# Altium PCB PCB2.PcbDoc
Units mil, origin at the board's own origin, x right, y up, seen from the top; angles counter-clockwise.
Board outline 942.27 x 4047.27 mil, 2 copper layers (Top Layer, Bottom Layer); 4 components, 12 nets, 32 pads, 0 vias.
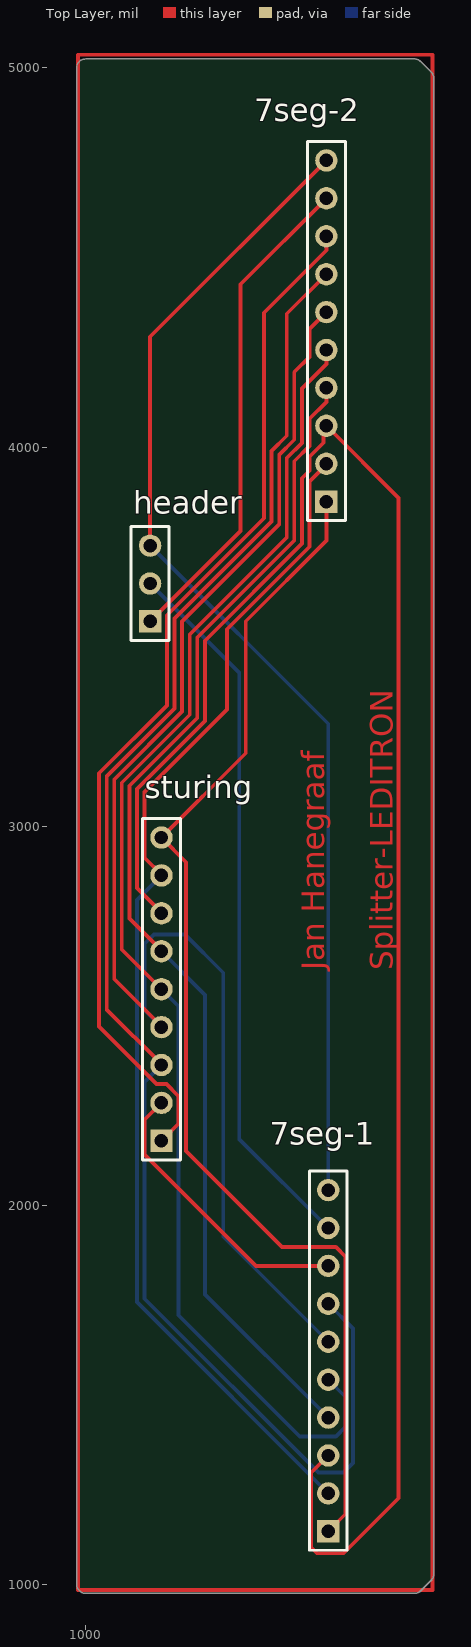
[diagram p0: Top Layer view]
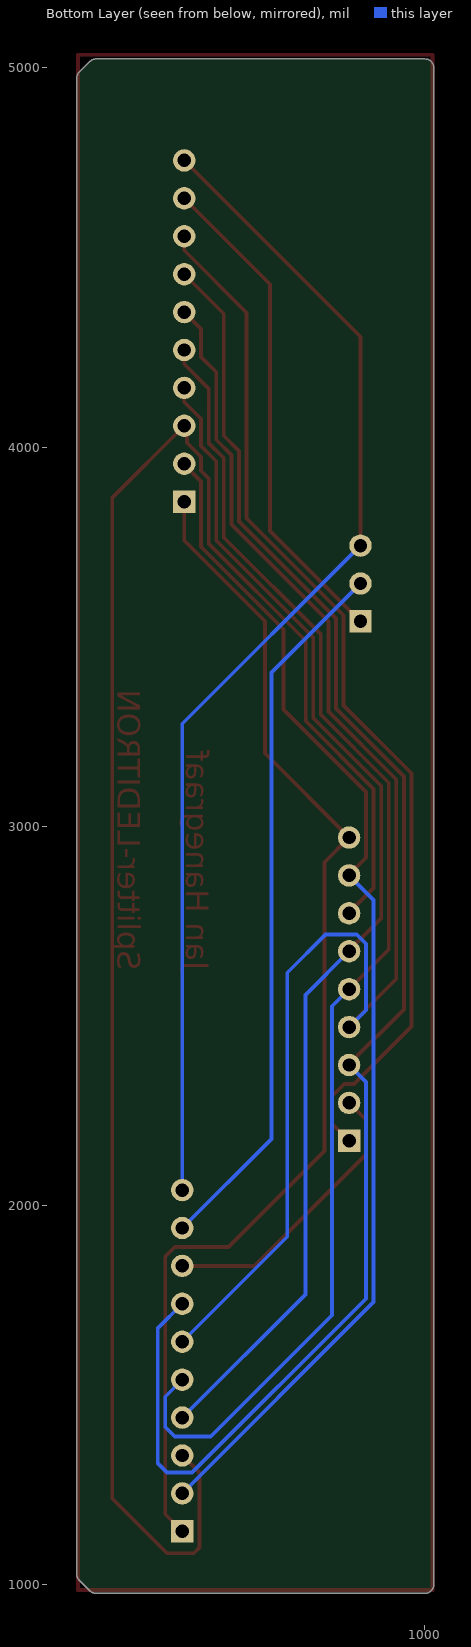
[diagram p1: Bottom Layer view, seen from below]

## Layer stack, top to bottom
Top Solder: solder mask 0.4, Solder Resist, Dk 3.5
Top Layer: signal copper 1.4
Dielectric 1: dielectric 12.6, FR-4, Dk 4.8
Bottom Layer: signal copper 1.4
Bottom Solder: solder mask 0.4, Solder Resist, Dk 3.5

## Board outline
1000,976.36 cw(c1000,1000) 976.36,1000 976.36,5000 cw(c1000,5000) 1000,5023.64 1867.33,5023.64 cw(c1867.33,5000) 1884.04,5016.71 1911.71,4989.04 cw(c1895,4972.33) 1918.64,4972.33 1918.64,1027.67 cw(c1895,1027.67) 1911.71,1010.96 1884.04,983.29 cw(c1867.33,1000) 1867.33,976.36

## Design rules (kind name [scope] priority, off if disabled: settings)
Clearance [All] p1: gap=10 ignorepadtopadclearanceinfootprint=FALSE except(0: Arc-Hole Track-Hole SMDPad-Hole THPad-Hole Via-Hole Fill-Hole Poly-Hole Region-Hole Text-Hole)
PolygonConnect [All] p1: connectstyle=Relief reliefconductorwidth=10 reliefentries=4 polygonreliefangle="90 Angle" airgapwidth=10
RoutingVias [All] p1: holewidth=28 width=50 viastyle="Through Hole" minholewidth=28 minwidth=50 maxholewidth=28 maxwidth=50
SolderMaskExpansion [All] p1: expansion=4 istentingtop=FALSE
Width [All] p1: maxlimit=10 minlimit=10 preferedwidth=10
30 further rules are at their usual default settings.

## Classes and differential pairs
component class tussenprint: 7seg-2 header sturing

## Components (designator, comment, footprint, x,y, rotation, side; value= is the part's Value field where it differs from the comment)
7seg-1 "Header 10" HDR1X10 1640,1140 r90 top
7seg-2 "Header 10" HDR1X10 1635,3856 r90 top
header "Header 3" HDR1X3 1170,3540 r90 top
sturing "Header 9" HDR1X9 1200,2170 r90 top

## Footprints (in the part's own frame and the unit in brackets; to place one, negate y for a bottom-side part, rotate by r counter-clockwise, add the part's x,y. Pads: shape width x height; smd on the part's side, far side on the other; paste and mask are expansions set on the pad)
HDR1X3 [mm] "Connector; Header; 3 Position"
  rect 1.5x1.5 hole 0.9: 1(0,0)
  round 1.5 hole 0.9: 2(2.54,0) 3(5.08,0)
  silkscreen extent -1.27,-1.27 6.35,1.27
HDR1X9 [mm] "Connector; Header; 9 Position"
  rect 1.5x1.5 hole 0.9: 1(0,0)
  round 1.5 hole 0.9: 2(2.54,0) 3(5.08,0) 4(7.62,0) 5(10.16,0) 6(12.7,0) 7(15.24,0) 8(17.78,0) 9(20.32,0)
  silkscreen extent -1.27,-1.27 21.59,1.27
HDR1X10 [mm] "Connector; Header; 10 Position"
  rect 1.5x1.5 hole 0.9: 1(0,0)
  round 1.5 hole 0.9: 2(2.54,0) 3(5.08,0) 4(7.62,0) 5(10.16,0) 6(12.7,0) 7(15.24,0) 8(17.78,0) 9(20.32,0) 10(22.86,0)
  silkscreen extent -1.27,-1.27 24.13,1.27

## Part data
7seg-1 7seg-2: "Header, 10-Pin", LatestRevisionDate=17-Jul-2002, LatestRevisionNote="Re-released for DXP Platform.", Publisher="Altium Limited"
header: "Header, 3-Pin", LatestRevisionDate=17-Jul-2002, LatestRevisionNote="Re-released for DXP Platform.", Publisher="Altium Limited"
sturing: "Header, 9-Pin", LatestRevisionDate=17-Jul-2002, LatestRevisionNote="Re-released for DXP Platform.", Publisher="Altium Limited"

## Nets (pads, with @x,y where several pads share a name; then routed paths per layer and width w, separated by ;. In a path a pad name is that pad's centre, name@x,y a point inside that pad or via, vN(x,y) a via of type N, cw(c..) or ccw(c..) an arc to the next point about the centre after c; other vN are vias at no path point)
Net7seg-1_1: 7seg-1.1 7seg-2.1 sturing.9 | length 3198.9
  Top Layer w10: 7seg-2.1 1635,3753.16 1422.19,3540.35 1422.19,3192.19 sturing.9 1265,2905 1265,2143 1518,1890 1660,1890 1685,1865 1685,1185 7seg-1.1
Net7seg-1_2: 7seg-1.2 7seg-2.2 sturing.8 | length 3168.8
  Top Layer w10: sturing.8 1200,2872.2 1155.47,2916.73 1155.47,3089.81 1372.97,3307.31 1372.97,3519.42 1590.47,3736.92 1590.47,3909.27 1635,3953.8 7seg-2.2
  Bottom Layer w10: sturing.8 1135.47,2805.47 1135.47,1744.53 7seg-1.2
Net7seg-1_3: 7seg-1.3 7seg-2.3 sturing.7 | length 4985.3
  Top Layer w10: sturing.7 1200,2772.2 1135.47,2836.73 1135.47,3098.1 1314.53,3277.15 1314.53,3489.25 1570.47,3745.2 1570.47,3917.56 1590.47,3937.56 1590.47,3974.44 1627.5,4011.47 1627.5,4048.5 7seg-2.3 1825,3866 1825,1227 1680,1082 1610,1082 1595,1097 1595,1295 7seg-1.3
Net7seg-1_4: 7seg-1.4 7seg-2.4 sturing.6 | length 3148.5
  Top Layer w10: sturing.6 1200,2672.2 1115.47,2756.73 1115.47,3106.38 1294.53,3285.44 1294.53,3497.54 1550.47,3753.48 1550.47,3962.73 1590.47,4002.73 1590.47,4074.44 1635,4118.97 7seg-2.4
  Bottom Layer w10: sturing.6 1315,2555 1315,1765 7seg-1.4
Net7seg-1_5: 7seg-1.5 7seg-2.5 sturing.5 | length 3558
  Top Layer w10: sturing.5 1095.47,2674.53 1095.47,3114.67 1274.53,3293.72 1274.53,3505.82 1530.47,3761.77 1530.47,3971.01 1570.47,4011.01 1570.47,4154.44 1635,4218.97 7seg-2.5
  Bottom Layer w10: sturing.5 1245,2525 1245,1710 1565,1390 1660,1390 1685,1415 1685,1495 7seg-1.5
Net7seg-1_6: 7seg-1.6 7seg-2.6 sturing.4 | length 3755.6
  Top Layer w10: sturing.4 1200,2472.2 1075.47,2596.73 1075.47,3122.95 1254.53,3302.01 1254.53,3539.68 1510.47,3795.62 1510.47,3979.3 1550.47,4019.3 1550.47,4197.56 1590.47,4237.56 1590.47,4311.47 7seg-2.6
  Bottom Layer w10: sturing.4 1155.47,2514.53 1155.47,2690 1180,2714.53 1262,2714.53 1363,2613.53 1363,1917 7seg-1.6
Net7seg-1_7: 7seg-1.7 7seg-2.7 sturing.3 | length 4217.6
  Top Layer w10: sturing.3 1200,2372.2 1055.47,2516.73 1055.47,3131.24 1234.53,3310.29 1234.53,3547.96 1490.47,3803.9 1490.47,3989.59 1530.47,4029.59 1530.47,4351.47 7seg-2.7
  Bottom Layer w10: sturing.3 1155.47,2325.47 1155.47,1753.53 1614,1295 1680,1295 1705,1320 1705,1675 7seg-1.7
Net7seg-1_8: 7seg-1.8 sturing.2 | length 760.6
  Top Layer w10: sturing.2 1155.47,2225.47 1155.47,2134.26 1449.73,1840 7seg-1.8
Net7seg-1_9: 7seg-1.9 header.2 | length 1894.7
  Bottom Layer w10: header.2 1405,3405 1405,2175 7seg-1.9
Net7seg-1_10: 7seg-1.10 7seg-2.10 header.3 | length 3103.3
  Top Layer w10: header.3 1170,4291 7seg-2.10
  Bottom Layer w10: header.3 1640,3270 7seg-1.10
Net7seg-2_8: 7seg-2.8 sturing.1 | length 2754.6
  Top Layer w10: sturing.1 1244.53,2214.53 1244.53,2288.44 1212.97,2320 1187.03,2320 1035.47,2471.56 1035.47,3139.52 1214.53,3318.57 1214.53,3556.24 1470.47,3812.19 1470.47,4354.44 1635,4518.97 7seg-2.8
Net7seg-2_9: 7seg-2.9 header.1 | length 1308.6
  Top Layer w10: header.1 1408.28,3778.28 1408.28,4429.28 7seg-2.9
copper on no net: | length 9970
  Top Layer w10: 980,985 1915,985 1915,5035 980,5035 980,985

## Other copper
Top Layer:
  text "Jan Hanegraaf /  / Splitter-LEDITRON" at 1810,2620 h60 r90